# EAGLE board UsbA (EAGLE 6.5.0)
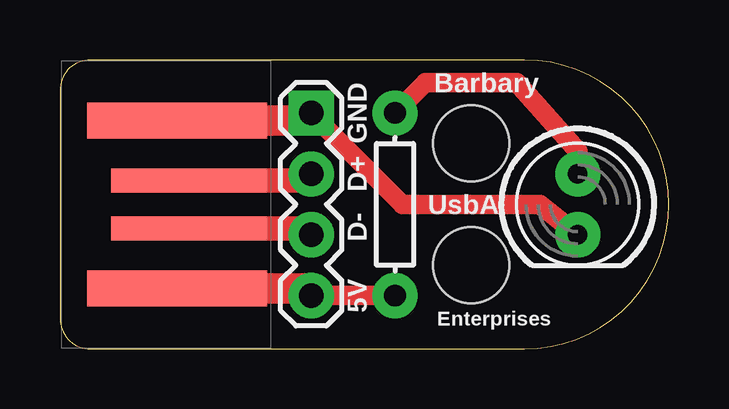
[diagram p0: board, top side]
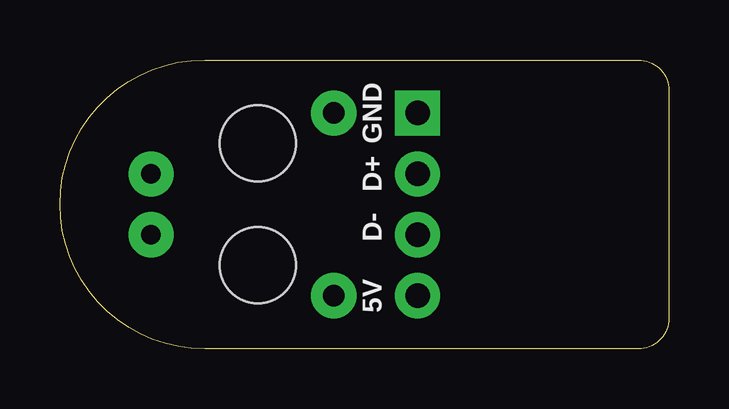
[diagram p1: board, bottom side, seen from below]

Size 25.39 x 12.05 mm. Coordinates in mm from the lower left corner, seen from the top.
Outline: 0,10.79 0,1.27 arc90 1.27,0 19.36,0 arc90 25.39,6.03 arc90 19.36,12.05 1.27,12.05 arc90 0,10.79
Copper layers (1*16): Top 0.0356mm / dielectric 1.5011mm / Bottom 0.0356mm
Design rules "LaenPCBOrder": minimum track width 6mil, minimum drill 13mil, track to track 6mil, track to pad 6mil, pad to pad 6mil, via to via 6mil, smd to smd 6mil, copper to edge 15mil, drill to drill 6mil, minimum pad ring 7mil, minimum via ring 7mil, stop-mask expansion 3mil, vias tented up to drill 0mil, thermal gap 10mil
Holes 3.17 mm at 17.14,8.57 17.14,3.49

## Footprints (pad centres in the part's own frame; a part is rotated, then mirrored left to right if it is on the bottom)
USBA_PCB = smd 7.5 x 1.5: GND -0.2,3.5; VCC -0.2,-3.5 | smd 6.5 x 1: USB_NEG 0.3,-1; USB_PLUS 0.3,1
1X04 = drill 1.016 pad 1.88 square: 1 0,0 | drill 1.016 pad 1.88: 2 2.54,0; 3 5.08,0; 4 7.62,0
LED5MM = drill 0.813 pad 1.88: A -1.27,0; K 1.27,0
AXIAL-0.3 = drill 0.9 pad 1.88: P$1 -3.81,0; P$2 3.81,0

## Placement (x,y rotation side)
CN1  [USBA_PCB]  5.08,6.03 0 top
JP1  [1X04]  10.48,9.84 270 top
LED1  [LED5MM]  21.59,6.03 270 top
R1  [AXIAL-0.3]  13.97,6.03 270 top

## Library data of the parts
CN1 = barbary_enterprises
JP1 = SparkFun-Connectors
LED1 = SparkFun-LED
R1 = SparkFun-Resistors

## Nets
5V: CN1.VCC JP1.4 R1.P$2
D+: CN1.USB_PLUS JP1.2
D-: CN1.USB_NEG JP1.3
GND: CN1.GND JP1.1 LED1.K
N$1: LED1.A R1.P$1

## Tracks (layer width: path | path; a pad name or v marks a point on that pad's centre or on a via)
5V
  Top 0.813: R1.P$2 JP1.4
  Top 1.27: CN1.VCC 10.17,2.53 JP1.4
D+
  Top 1.016: CN1.USB_PLUS 10.21,7.03 JP1.2
D-
  Top 1.016: CN1.USB_NEG 10.21,5.03 JP1.3
GND
  Top 0.813: LED1.K 20,6.03 14.29,6.03 JP1.1
  Top 1.27: CN1.GND 10.17,9.53 JP1.1
N$1
  Top 0.813: LED1.A 21.59,8.26 19.05,11.11 15.24,11.11 R1.P$1

## Text on the board
tPlace: Barbary | GND | D+ | UsbA | D- | 5V | Enterprises
bPlace: GND | D+ | D- | 5V